# Altium PCB WEST_Radio_AX5043.PcbDoc (part 3 of 3)
Units mil, origin at the board's own origin, x right, y up, seen from the top; angles counter-clockwise.
Board outline 6000 x 4000 mil, 2 copper layers (Top Layer, Bottom Layer); 127 components, 96 nets, 412 pads, 18 vias.
Unrouted connection lines stored in the file: 276.
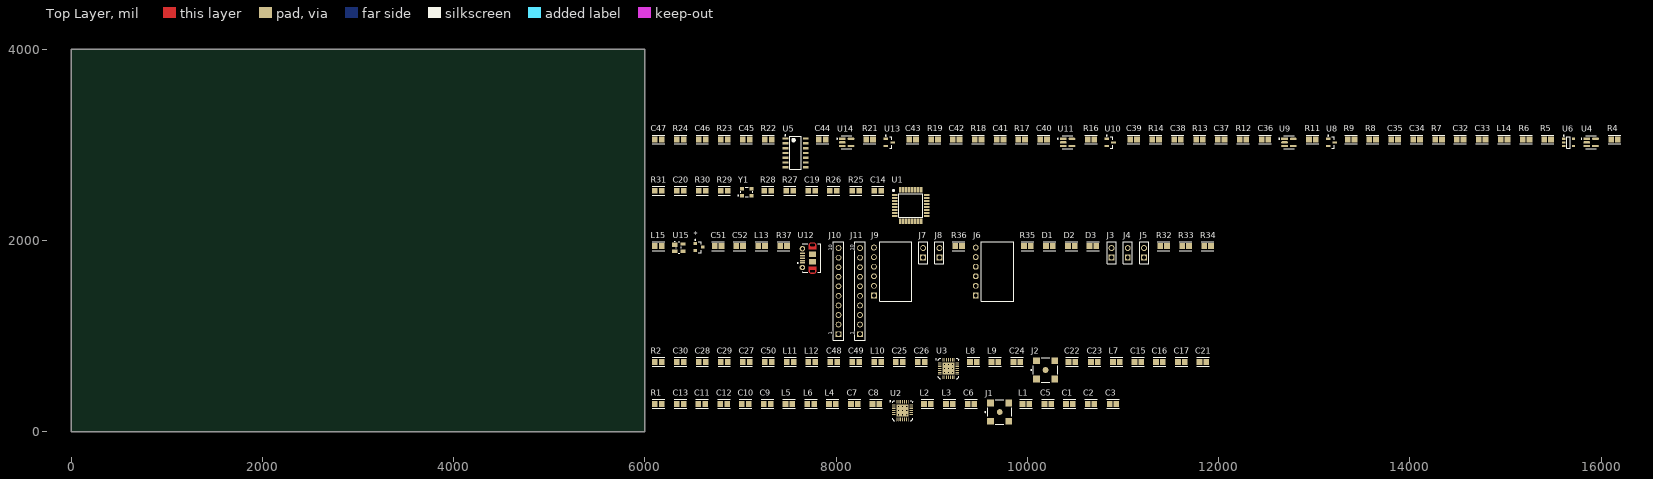
[diagram p0: Top Layer view]

## Part data (continued)
U5: "IC OPAMP GP 1MHZ RRO 14SOIC", Case/Package=SOIC, Input Bias Current=250nA, Input Offset Voltage (Vos)=7mV, Manufacturer="Texas Instruments", Max Operating Temperature=125°C, Max Supply Voltage=5.5V, Min Operating Temperature=-40°C, Min Supply Voltage=2.7V, Nominal Supply Current=170uA, Operating Supply Current=410uA, Output Current=160mA, Package Quantity=1, Power Supply Rejection Ratio (PSRR)=50dB, Supplier Part Number 1=296-9569-6-ND, Voltage Gain=100dB, Bandwidth=1MHz, Category="Amplifiers - Op Amps, Buffer, Instrumentation", Common Mode Rejection Ratio=50dB, ComponentLink1Description=https://datasheet.ciiva.com/27050/903031-27050788.pdf?src-supplier=Jameco, ComponentLink1URL=https://datasheet.ciiva.com/27050/903031-27050788.pdf?src-supplier=Jameco, ComponentLink2Description=https://datasheet.ciiva.com/1803/lmv324-1803154.pdf?src-supplier=Digi-Key, ComponentLink2URL=https://datasheet.ciiva.com/1803/lmv324-1803154.pdf?src-supplier=Digi-Key, ComponentLink3Description=https://datasheet.ciiva.com/1803/lmv324-1803153.pdf?src-supplier=Digi-Key, ComponentLink3URL=https://datasheet.ciiva.com/1803/lmv324-1803153.pdf?src-supplier=Digi-Key, ComponentLink4Description=https://datasheet.ciiva.com/1803/lmv324-1803155.pdf?src-supplier=Digi-Key, ComponentLink4URL=https://datasheet.ciiva.com/1803/lmv324-1803155.pdf?src-supplier=Digi-Key, ComponentLink5Description=https://datasheet.ciiva.com/2973/lmv358-2973572.pdf?src-supplier=Avnet, ComponentLink5URL=https://datasheet.ciiva.com/2973/lmv358-2973572.pdf?src-supplier=Avnet, ComponentLink6Description=https://datasheet.ciiva.com/2973/lmv358-2973571.pdf?src-supplier=Avnet, ComponentLink6URL=https://datasheet.ciiva.com/2973/lmv358-2973571.pdf?src-supplier=Avnet, Contact Plating=Gold, Gain Bandwidth Product=1MHz, Height=1.58mm, Lead Free="Lead Free", Length=8.65mm, Manufacturer Part Number=LMV324IDR, Mount="Surface Mount", Number of Amplifiers=4, Number of Channels=4, Number of Circuits=4, Number of Elements=4, Number of Pins=14, Output Current per Channel=160mA, Packaging="Tape and Reel", Pricing 1="1=0.62000, 10=0.53300, 25=0.49720, 100=0.39770, 250=0.36932, 500=0.31248, 1000=0.24147 (USD)", Radiation Hardening=No, REACH SVHC="No SVHC", RoHS=Yes, RoHS Compliant=Yes, Slew Rate=1V/µs, Supplier 1=Digi-Key, Unity Gain Bandwidth Product=1MHz, Width=3.91mm
U6: library part LMR10515YMFE/NOPB, "5.5Vin, 1.5A Step-Down Voltage Regulator in SOT-23 and LLP 5-SOT-23 -40 to 125", Case/Package=SOT-23-5, Manufacturer="TI National Semiconductor", Max Input Voltage=5.5V, Max Operating Temperature=125°C, Max Output Current=1.5A, Max Output Voltage=4.5V, Min Input Voltage=3V, Min Operating Temperature=-40°C, Min Output Voltage=600mV, Package Quantity=250, Quiescent Current=3.3mA, Supplier Part Number 1=LMR10515YMFE/NOPBCT-ND, Switching Frequency=3MHz, Category="Voltage Regulators - Switching", ComponentLink1Description=https://datasheet.ciiva.com/41458/001014244-da-01-en-ic-reg-bu-lmr10515ymfe-nopb-sot-23-5-tid-41458601.pdf?src-supplier=Conrad, ComponentLink1URL=https://datasheet.ciiva.com/41458/001014244-da-01-en-ic-reg-bu-lmr10515ymfe-nopb-sot-23-5-tid-41458601.pdf?src-supplier=Conrad, ComponentLink2Description=https://datasheet.ciiva.com/22669/1882168-22669494.pdf?src-supplier=Element14, ComponentLink2URL=https://datasheet.ciiva.com/22669/1882168-22669494.pdf?src-supplier=Element14, ComponentLink3Description=https://datasheet.ciiva.com/3230/lmr10515-3230063.pdf?src-supplier=Avnet, ComponentLink3URL=https://datasheet.ciiva.com/3230/lmr10515-3230063.pdf?src-supplier=Avnet, ComponentLink4Description=https://datasheet.ciiva.com/2029/lmr10515-2029543.pdf?src-supplier=Digi-Key, ComponentLink4URL=https://datasheet.ciiva.com/2029/lmr10515-2029543.pdf?src-supplier=Digi-Key, ComponentLink5Description=https://datasheet.ciiva.com/2029/lmr10515-2029544.pdf?src-supplier=Digi-Key, ComponentLink5URL=https://datasheet.ciiva.com/2029/lmr10515-2029544.pdf?src-supplier=Digi-Key, ComponentLink6Description=https://datasheet.ciiva.com/2029/lmr10515-2029542.pdf?src-supplier=Digi-Key, ComponentLink6URL=https://datasheet.ciiva.com/2029/lmr10515-2029542.pdf?src-supplier=Digi-Key, Contact Plating=Tin,Matte, Efficiency=93%, Height=1.3mm, Lead Free="Lead Free", Length=3.05mm, Manufacturer Part Number=LMR10515YMFE/NOPB, Mount="Surface Mount", Number of Outputs=1, Number of Pins=5, Output Configuration=Positive, Output Current=1.5A, Output Type=Adjustable, Output Voltage=4.5V, Packaging="Tape and Reel", Pricing 1="1=1.57000, 10=1.40400, 25=1.33280, 100=1.09470 (USD)", Radiation Hardening=No, REACH SVHC="No SVHC", RoHS=Yes, RoHS Compliant=Yes, Series="SIMPLE SWITCHER®", Stock 1=3772, Supplier 1=Digi-Key, Synchronous Rectifier=No, Width=1.75mm
U8 U10 U13: library part MCP1700T-3302E/TT, "IC REG LDO 3.3V 0.25A SOT23-3", Case/Package=SOT-23, Dropout Voltage=178mV, Input Bias Current=1.6uA, Manufacturer=Microchip, Max Input Voltage=6V, Max Operating Temperature=125°C, Max Output Current=250mA, Max Output Voltage=3.3V, Max Power Dissipation=369.6mW, Min Input Voltage=2.3V, Min Operating Temperature=-40°C, Nominal Supply Current=4uA, Output Voltage Accuracy=2%, Package Quantity=3000, Supplier Part Number 1=MCP1700T3302ETTDKR-ND, Accuracy=2%, Category="Voltage Regulators - Linear", ComponentLink1Description=https://datasheet.ciiva.com/5801/1784514-5801824.pdf?src-supplier=Farnell, ComponentLink1URL=https://datasheet.ciiva.com/5801/1784514-5801824.pdf?src-supplier=Farnell, ComponentLink2Description=https://datasheet.ciiva.com/2040/21826b-2040112.pdf?src-supplier=Digi-Key, ComponentLink2URL=https://datasheet.ciiva.com/2040/21826b-2040112.pdf?src-supplier=Digi-Key, ComponentLink3Description=https://datasheet.ciiva.com/7649/1784514-7649813.pdf?src-supplier=Element14, ComponentLink3URL=https://datasheet.ciiva.com/7649/1784514-7649813.pdf?src-supplier=Element14, ComponentLink4Description=https://datasheet.ciiva.com/22710/1784514-22710988.pdf?src-supplier=Element14, ComponentLink4URL=https://datasheet.ciiva.com/22710/1784514-22710988.pdf?src-supplier=Element14, ComponentLink5Description=https://datasheet.ciiva.com/14150/mcp1700-eng-tds-14150122.pdf?src-supplier=Distrelec, ComponentLink5URL=https://datasheet.ciiva.com/14150/mcp1700-eng-tds-14150122.pdf?src-supplier=Distrelec, ComponentLink6Description=https://datasheet.ciiva.com/8041/1784514-8041598.pdf?src-supplier=Element14, ComponentLink6URL=https://datasheet.ciiva.com/8041/1784514-8041598.pdf?src-supplier=Element14, ComponentLink7Description=https://datasheet.ciiva.com/3224/jp011779-3224133.pdf?src-supplier=Avnet, ComponentLink7URL=https://datasheet.ciiva.com/3224/jp011779-3224133.pdf?src-supplier=Avnet, ComponentLink8Description=https://datasheet.ciiva.com/16208/filehandler-aspxddocname-en011779-16208911.pdf?src-supplier=Future+Electronics, ComponentLink8URL=https://datasheet.ciiva.com/16208/filehandler-aspxddocname-en011779-16208911.pdf?src-supplier=Future+Electronics, ComponentLink9Description=https://datasheet.ciiva.com/15200/getdatasheetpartid-453599-15200229.pdf?src-supplier=Verical, ComponentLink9URL=https://datasheet.ciiva.com/15200/getdatasheetpartid-453599-15200229.pdf?src-supplier=Verical, ComponentLink10Description=https://datasheet.ciiva.com/2040/21826b-2040113.pdf?src-supplier=Digi-Key, ComponentLink10URL=https://datasheet.ciiva.com/2040/21826b-2040113.pdf?src-supplier=Digi-Key, ComponentLink11Description=https://datasheet.ciiva.com/2040/21826b-2040114.pdf?src-supplier=Digi-Key, ComponentLink11URL=https://datasheet.ciiva.com/2040/21826b-2040114.pdf?src-supplier=Digi-Key, ComponentLink12Description=https://datasheet.ciiva.com/29305/651414-da-01-en-ic-reg-ld-mcp1700t-3302e-tt-sot-23-3-mcp-29305258.pdf?src-supplier=Conrad, ComponentLink12URL=https://datasheet.ciiva.com/29305/651414-da-01-en-ic-reg-ld-mcp1700t-3302e-tt-sot-23-3-mcp-29305258.pdf?src-supplier=Conrad, Contact Plating=Tin,Matte, Height=0.95mm, Lead Free="Lead Free", Length=2.9mm, Manufacturer Part Number=MCP1700T-3302E/TT, Max Supply Voltage=6V, Min Output Voltage=3.3V, Min Supply Voltage=2.3V, Mount="Surface Mount", Nominal Output Voltage=3.3V, Number of Outputs=1, Number of Pins=3, Output Current=250mA, Output Type=Fixed, Output Voltage=3.3V, Packaging="Tape and Reel", Polarity=Positive, Power Dissipation=369.6mW, Pricing 1="1=0.46000, 25=0.38160, 100=0.37500 (USD)", Quiescent Current=4uA, Radiation Hardening=No, REACH SVHC="No SVHC", RoHS=Yes, RoHS Compliant=Yes, Supplier 1=Digi-Key, Supply Current=4uA, Termination=SMD/SMT, Width=1.3mm
U12: library part 1050170001, "CONN RCPT MICRO USB R/A SMD", Current Rating=1.8A, Flammability Rating="UL94 V-0", Insulation Color=Black, Manufacturer=Molex, Max Operating Temperature=85°C, Max Voltage Rating (AC)=30V, Min Operating Temperature=-30°C, Package Quantity=2000, Supplier Part Number 1=WM1399CT-ND, Category=Connectors, ComponentLink1Description=https://datasheet.ciiva.com/30165/235271050170001-io-nectors-30165183.pdf?src-supplier=Onlinecomponents.com, ComponentLink1URL=https://datasheet.ciiva.com/30165/235271050170001-io-nectors-30165183.pdf?src-supplier=Onlinecomponents.com, ComponentLink2Description=https://datasheet.ciiva.com/8015/1631959-8015288.pdf?src-supplier=Element14, ComponentLink2URL=https://datasheet.ciiva.com/8015/1631959-8015288.pdf?src-supplier=Element14, ComponentLink3Description=https://datasheet.ciiva.com/5742/1598502-5742508.pdf?src-supplier=Farnell, ComponentLink3URL=https://datasheet.ciiva.com/5742/1598502-5742508.pdf?src-supplier=Farnell, ComponentLink4Description=https://datasheet.ciiva.com/22654/1688140-22654924.pdf?src-supplier=Element14, ComponentLink4URL=https://datasheet.ciiva.com/22654/1688140-22654924.pdf?src-supplier=Element14, ComponentLink5Description=https://datasheet.ciiva.com/3094/1050170001-io-connectors-3094416.pdf?src-supplier=Avnet, ComponentLink5URL=https://datasheet.ciiva.com/3094/1050170001-io-connectors-3094416.pdf?src-supplier=Avnet, ComponentLink6Description=https://datasheet.ciiva.com/4598/1050170001-io-connectors-152207-4598759.pdf?src-supplier=Mouser, ComponentLink6URL=https://datasheet.ciiva.com/4598/1050170001-io-connectors-152207-4598759.pdf?src-supplier=Mouser, ComponentLink7Description=https://datasheet.ciiva.com/851/1050170001-sd-851276.pdf?src-supplier=Digi-Key, ComponentLink7URL=https://datasheet.ciiva.com/851/1050170001-sd-851276.pdf?src-supplier=Digi-Key, ComponentLink8Description=https://datasheet.ciiva.com/16668/1050170001-io-connectors-16668598.pdf?src-supplier=Avnet+Europe, ComponentLink8URL=https://datasheet.ciiva.com/16668/1050170001-io-connectors-16668598.pdf?src-supplier=Avnet+Europe, ComponentLink9Description=https://datasheet.ciiva.com/851/1050170001-sd-851277.pdf?src-supplier=Digi-Key, ComponentLink9URL=https://datasheet.ciiva.com/851/1050170001-sd-851277.pdf?src-supplier=Digi-Key, ComponentLink10Description=https://datasheet.ciiva.com/851/1050170001-sd-851278.pdf?src-supplier=Digi-Key, ComponentLink10URL=https://datasheet.ciiva.com/851/1050170001-sd-851278.pdf?src-supplier=Digi-Key, Connector Type=USB,Receptacle, Contact Material="Copper Alloy,Copper", Contact Plating=Gold, Depth=7.5mm, Features=Shielded, Gender=Receptacle, Halogen Free="Low Halogen", Housing Material=Polymer, Length=8.2mm, Manufacturer Part Number=1050170001, Mating Cycles=10000, Mount="Surface Mount,Through Hole,Horizontal", Number of Circuits=5, Number of Contacts=5, Number of Ports=1, Number of Positions=5, Number of Terminals/Pins=5, Orientation="Right Angle", Packaging="Tape and Reel", Pitch=0.65mm, Pricing 1="1=0.96000, 10=0.79400, 100=0.66150, 1000=0.52920 (USD)", Radiation Hardening=No, REACH SVHC=Unknown, RoHS=Yes, RoHS Compliant=Yes, Series=105017, Shielding=Shielded, Stock 1=284736, Supplier 1=Digi-Key, Termination=Solder, USB Standard="USB 2.0", Voltage Rating=30V, Voltage Rating (AC)=30V
U15: library part SP0503BAHTG, "TVS二极管 5.5V 单向", Breakdown Voltage=5.5V, Capacitance=30pF, Case/Package=SOT-143, Clamping Voltage=7.8V, Clamping Voltage-Max=8V, Leakage Current=100nA, Manufacturer=Littelfuse, Max Operating Temperature=85°C, Max Power Dissipation=225mW, Min Operating Temperature=-40°C, Power Line Protection=No, Resistor Type=Zener, Supplier Part Number 1=F2715CT-ND, Voltage Rating (DC)=5V, Category="TVS Diodes", ComponentLink1Description=https://datasheet.ciiva.com/15143/getdatasheetpartid-116020-15143550.pdf?src-supplier=Verical, ComponentLink1URL=https://datasheet.ciiva.com/15143/getdatasheetpartid-116020-15143550.pdf?src-supplier=Verical, ComponentLink2Description=https://datasheet.ciiva.com/7650/526672-7650894.pdf?src-supplier=Element14, ComponentLink2URL=https://datasheet.ciiva.com/7650/526672-7650894.pdf?src-supplier=Element14, ComponentLink3Description=https://datasheet.ciiva.com/8062/littefuse-spa-sp050x-8062422.pdf?src-supplier=Element14, ComponentLink3URL=https://datasheet.ciiva.com/8062/littefuse-spa-sp050x-8062422.pdf?src-supplier=Element14, ComponentLink4Description=https://datasheet.ciiva.com/22697/1911798-22697942.pdf?src-supplier=Element14, ComponentLink4URL=https://datasheet.ciiva.com/22697/1911798-22697942.pdf?src-supplier=Element14, ComponentLink5Description=https://datasheet.ciiva.com/4509/sp05x-leadfree-4509162.pdf?src-supplier=Mouser, ComponentLink5URL=https://datasheet.ciiva.com/4509/sp05x-leadfree-4509162.pdf?src-supplier=Mouser, ComponentLink6Description=https://datasheet.ciiva.com/332/sp05xxba-332551.pdf?src-supplier=Digi-Key, ComponentLink6URL=https://datasheet.ciiva.com/332/sp05xxba-332551.pdf?src-supplier=Digi-Key, ComponentLink7Description=https://datasheet.ciiva.com/332/sp05xxba-332552.pdf?src-supplier=Digi-Key, ComponentLink7URL=https://datasheet.ciiva.com/332/sp05xxba-332552.pdf?src-supplier=Digi-Key, ComponentLink8Description=https://datasheet.ciiva.com/332/sp05xxba-332550.pdf?src-supplier=Digi-Key, ComponentLink8URL=https://datasheet.ciiva.com/332/sp05xxba-332550.pdf?src-supplier=Digi-Key, ComponentLink9Description=https://datasheet.ciiva.com/16449/sp05xxba-16449463.pdf?src-supplier=Future+Electronics, ComponentLink9URL=https://datasheet.ciiva.com/16449/sp05xxba-16449463.pdf?src-supplier=Future+Electronics, Depth=1.4mm, Diode Type=Avalanche, Direction=Unidirectional, Element Configuration="Common Anode", ESD Protection=Yes, Height=1.05mm, Lead Free="Lead Free", Length=3.04mm, Manufacturer Part Number=SP0503BAHTG, Max Reverse Leakage Current=100nA, Mount="Surface Mount", Number of Channels=3, Number of Elements=3, Number of Pins=4, Number of Unidirectional Channels=3, Operating Supply Voltage=5.5V, Packaging="Tape and Reel", Peak Pulse Power=225mW, Polarity=Bidirectional,Unidirectional, Power Dissipation=225mW, Pricing 1="1=0.92000, 10=0.81200, 100=0.62260, 500=0.49214, 1000=0.39371 (USD)", Radiation Hardening=No, REACH SVHC="No SVHC", Reverse Standoff Voltage=5.5V, RoHS=Yes, RoHS Compliant=Yes, Series="SP05, SPA®", Stock 1=2768, Supplier 1=Digi-Key, Termination=SMD/SMT, Width=1.4mm, Working Voltage=5.5V
Y1: library part TXETDDSANF-16.000000, "Vctcxo @ 16.000MHZ, 2.8-3.3V, 2.5PPM", Case/Package=SMD/SMT, Frequency Stability=2.5ppm, Manufacturer="Taitien Electronics", Max Operating Temperature=85°C, Max Supply Current=2mA, Min Operating Temperature=-30°C, Supplier Part Number 1=1664-1278-1-ND, Category=Oscillators, ComponentLink1Description=http://www.taitien.com/wp-content/uploads/2015/12/XO-0076_TX.pdf?src-supplier=Digi-Key, ComponentLink1URL=http://www.taitien.com/wp-content/uploads/2015/12/XO-0076_TX.pdf?src-supplier=Digi-Key, Frequency=16MHz, Height=0.039inch, Length=0.126inch, Manufacturer Part Number=TXETDDSANF-16.000000, Mount="Surface Mount", Packaging="Tape and Reel", RoHS=Yes, Stock 1=4650, Supplier 1=Digi-Key, Width=0.098inch

## Via types
v1: diameter 19.68, hole 7.87, Top Layer to Bottom Layer, 18 vias

## Nets (pads, with @x,y where several pads share a name; then routed paths per layer and width w, separated by ;. In a path a pad name is that pad's centre, name@x,y a point inside that pad or via, vN(x,y) a via of type N, cw(c..) or ccw(c..) an arc to the next point about the centre after c; other vN are vias at no path point)
3V3: C34.1 C36.1 C40.1 C44.1 L14.2 R7.2 U8.3 U10.3 U13.3
Gnd: C14.2 C19.2 C20.2 C32.2 C33.2 C34.2 C35.2 C36.2 C37.2 C38.2 C39.2 C40.2 C41.2 C42.2 C43.2 C44.2 C45.2 C46.2 C47.2 D1.1 D2.1 D3.1 J3.2 J4.2 J5.2 J6.2 J9.3 L15.2 R2.2 R5.2 R8.1 R9.1 R12.2 R14.1 R17.2 R19.1 R22.2 R24.1 R27.1 R28.1 R29.2 R31.2 U1.5 U4.2 U5.11 U6.2 U8.1 U9.2 U10.1 U11.2 U13.1 U14.2 Y1.1 Y1.2
GND_U: C1.2 C2.2 C3.2 C5.1 C9.2 C11.2 C12.2 C13.2 J1.2 J1.3 J1.4 J1.5 J10.4 L1.2 L5.1 L6.1 R1.1 R1.2 U2.2 U2.6 U2.29
  other v1: 8651.69,176.69 8695,176.69 8738.31,176.69 8651.69,220 8695,220 8738.31,220 8651.69,263.31 8695,263.31 8738.31,263.31
GND_V: C15.2 C16.2 C17.2 C22.1 C23.1 C28.2 C29.2 C30.2 C48.2 C49.2 C50.2 J2.2 J2.3 J2.4 J2.5 J11.4 L7.2 L11.1 L12.1 R2.1 U3.2 U3.6 U3.29
  other v1: 9131.69,616.69 9175,616.69 9218.31,616.69 9131.69,660 9175,660 9218.31,660 9131.69,703.31 9175,703.31 9218.31,703.31
Net*_3: *.3 C51.1 C52.1 L13.1 U12.1 U15.4
NetC1_1: C1.1 U2.7
NetC2_1: C2.1 U2.1
NetC5_2: C5.2 L2.2 L3.1
NetC6_1: C6.1 L1.1 U2.3
NetC6_2: C6.2 L2.1
NetC7_1: C7.1 L5.2 U2.4
NetC7_2: C7.2 L4.1
NetC8_1: C8.1 C9.1 L4.2 L6.2
NetC8_2: C8.2 J1.1 L3.2
NetC10_1: C10.1 C13.1 U2.28
NetC10_2: C10.2 R28.2
NetC11_1: C11.1 U2.25
NetC12_1: C12.1 U2.26
NetC15_1: C15.1 U3.7
NetC16_1: C16.1 U3.1
NetC19_1: C19.1 J9.5 R25.1 R26.1
NetC21_1: C21.1 C21.2 C26.2 C48.1 C49.1 J2.1 L9.2
NetC22_2: C22.2 C24.1 L7.1 U3.3
NetC23_2: C23.2 L8.2 L9.1
NetC24_2: C24.2 L8.1
NetC25_1: C25.1 C50.1 L11.2 U3.4
NetC25_2: C25.2 L10.1
NetC26_1: C26.1 L10.2 L12.2
NetC27_1: C27.1 C30.1 U3.28
NetC27_2: C27.2 R29.1
NetC28_1: C28.1 U3.25
NetC33_1: C33.1 U4.4 U6.1 U6.3
NetC35_1: C35.1 R6.1 U1.13
NetC37_1: C37.1 C38.1 U8.2 U9.3 U9.5
NetC39_1: C39.1 R13.1 U1.14
NetC41_1: C41.1 C42.1 U10.2 U11.3 U11.5
NetC43_1: C43.1 R18.1 U1.9
NetC45_1: C45.1 C46.1 U13.2 U14.3 U14.5
NetC47_1: C47.1 R23.1 U1.10
NetD1_2: D1.2 J3.1 R32.2
NetD2_2: D2.2 J4.1 R33.2
NetD3_2: D3.2 J5.1 R34.2
NetJ6_1: J6.1 R35.2
NetJ6_3: J6.3 R36.2
NetJ6_4: J6.4 U1.30
NetJ6_5: J6.5 U1.31
NetJ7_1: J7.1 U1.11 U3.11
NetJ7_2: J7.2 U1.20 U3.12
NetJ8_1: J8.1 U1.12 U2.11
NetJ8_2: J8.2 U1.23 U2.12
NetJ9_2: J9.2 U1.25
NetJ9_4: J9.4 U1.24
NetJ10_5: J10.5 U1.26 U2.14
NetJ10_6: J10.6 U1.27 U2.15
NetJ10_7: J10.7 U1.28 U2.16
NetJ10_8: J10.8 U1.29 U2.17
NetJ10_9: J10.9 U1.15 U2.19
NetJ11_5: J11.5 U1.18 U3.14
NetJ11_6: J11.6 U1.7 U3.15
NetJ11_7: J11.7 U1.19 U3.16
NetJ11_8: J11.8 U1.21 U3.17
NetJ11_9: J11.9 U1.16 U3.19
NetL14_1: L14.1 U6.4
NetR4_1: R4.1 R6.2
NetR4_2: R4.2 R5.1
NetR7_1: R7.1 R9.2 U6.5
NetR8_2: R8.2 U4.1
NetR11_1: R11.1 R13.2
NetR11_2: R11.2 R12.1
NetR14_2: R14.2 U9.1
NetR16_1: R16.1 R18.2
NetR16_2: R16.2 R17.1
NetR19_2: R19.2 U11.1
NetR21_1: R21.1 R23.2 U5.1
NetR21_2: R21.2 R22.1 U5.2
NetR24_2: R24.2 U5.3 U14.1
NetR25_2: R25.2 U1.6
NetR30_2: R30.2 R31.1 Y1.3
NetR32_1: R32.1 U1.8
NetR33_1: R33.1 U1.1
NetR34_1: R34.1 U1.17
NetR37_1: R37.1 U12.4
NetU1_22: U1.22
NetU1_32: U1.32
NetU2_9: U2.9 U2.10
NetU2_21: U2.21
NetU3_9: U3.9 U3.10
NetU3_21: U3.21
NetU3_26: U3.26
OSC_OUT: R27.2 U1.2
U5V: C32.1 L13.2 R36.1 U4.3 U4.5
UGND: *.1 C51.2 C52.2 L15.1 R37.2 U12.5 U12.6 U12.7 U12.8 U12.9 U12.10 U12.11 U15.1
VCC: C20.1 R30.1 Y1.4
VCC_M: C14.1 J9.1 R26.2 R35.1 U1.4 U9.4
VCC_U: C3.1 J10.10 U2.23 U14.4
VCC_V: C17.1 J11.10 U3.23 U5.4 U11.4
pads on no net: *.2 C29.1 J6.6 J9.6 J10.1 J10.2 J10.3 J11.1 J11.2 J11.3 U1.3 U2.5 U2.8 U2.13 U2.18 U2.20 U2.22 U2.24 U2.27 U3.5 U3.8 U3.13 U3.18 U3.20 U3.22 U3.24 U3.27 U5.5 U5.6 U5.7 U5.8 U5.9 U5.10 U5.12 U5.13 U5.14 U12.2 U12.3 U15.2 U15.3

## Text inside footprints (layer, text, board x,y; h text height)
J10: Top Overlay "1" at 7958.07,1012.52 h40 r90; Top Overlay "10" at 7958.07,1893.23 h40 r90
J11: Top Overlay "1" at 8183.07,1012.52 h40 r90; Top Overlay "10" at 8183.07,1893.23 h40 r90
U12: Mechanical 1 "PCB EDGE" at 7814.17,1531.54 h11.81 r90